# Altium PCB RfLaunchPadAdapter.PcbDoc
Units mm, origin at the board's own origin, x right, y up, seen from the top; angles counter-clockwise.
Board outline 50.8 x 38 mm, 4 copper layers (TOP, PWR, GND, BOT), stack 0.777 mm thick; 16 components, 10 nets, 93 pads, 7 vias.
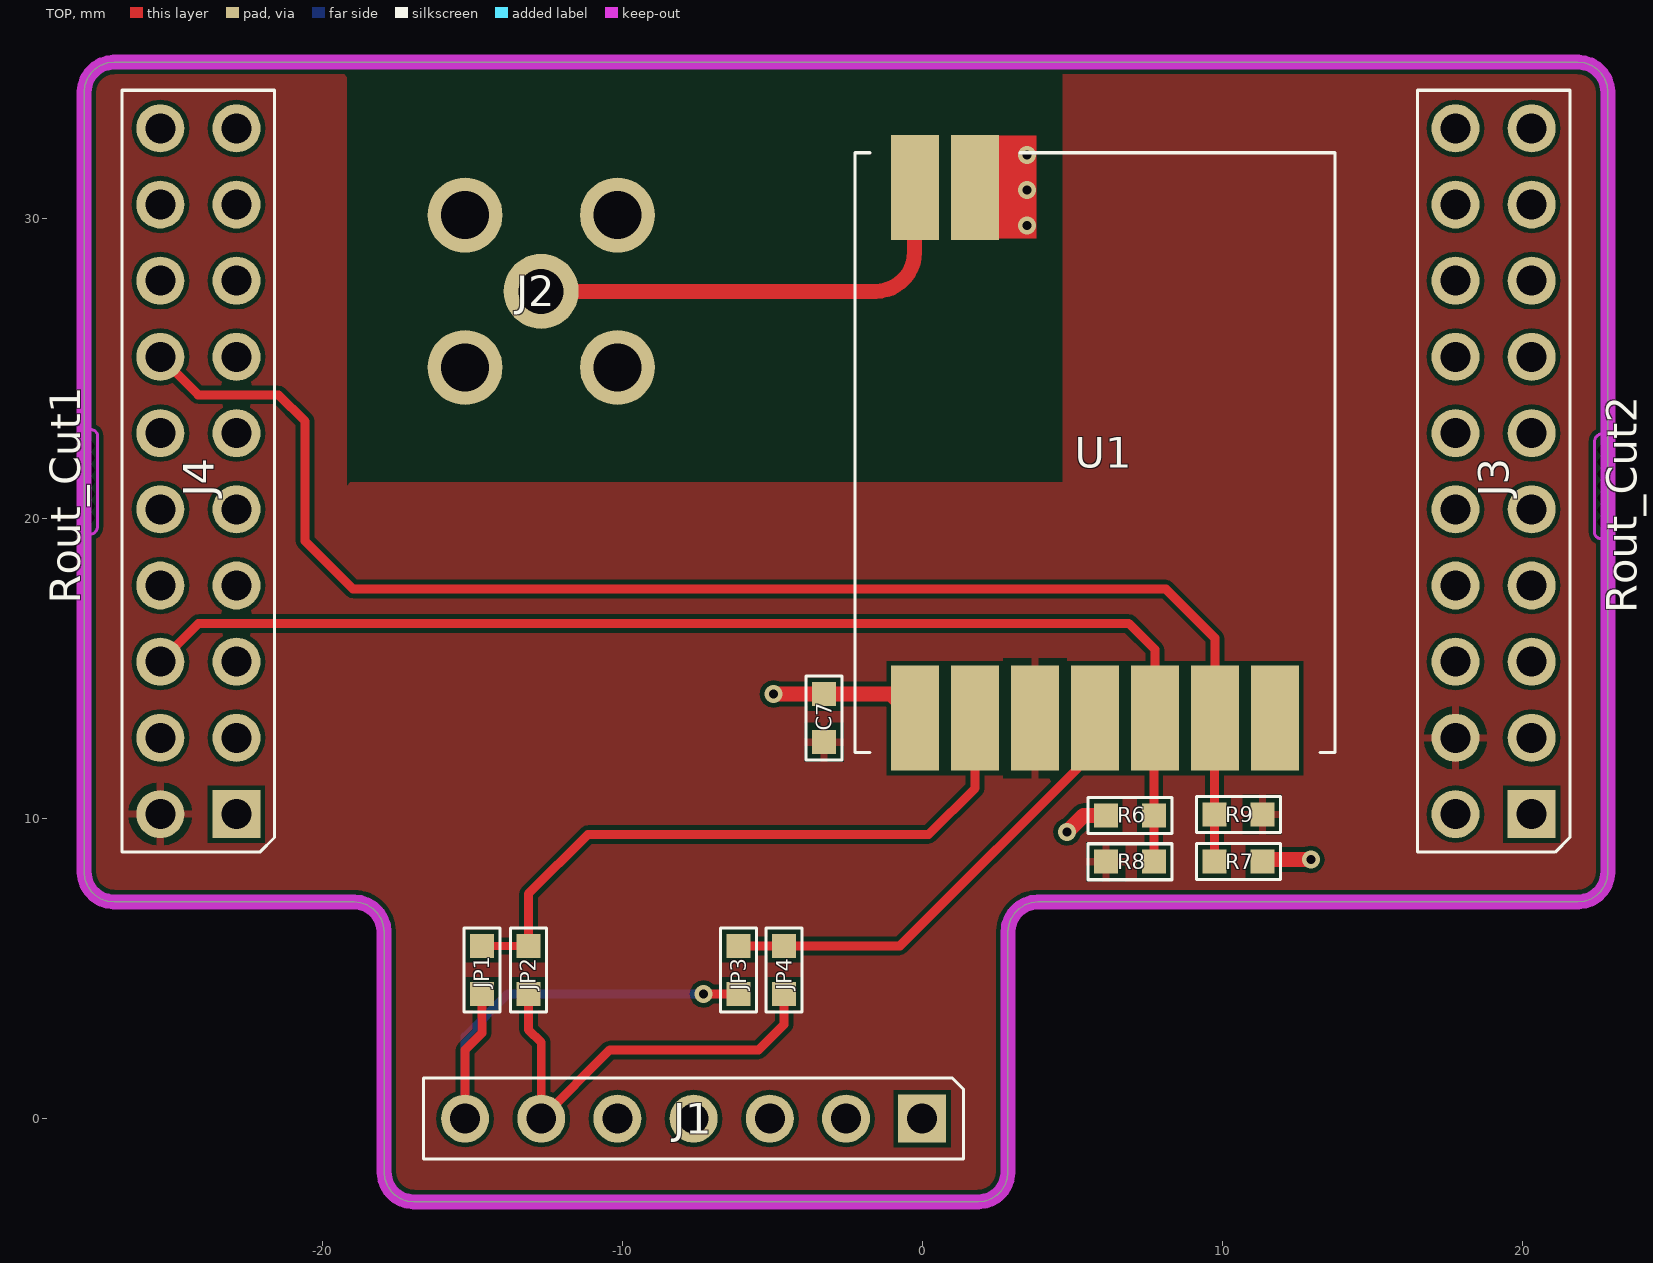
[diagram p0: TOP view]
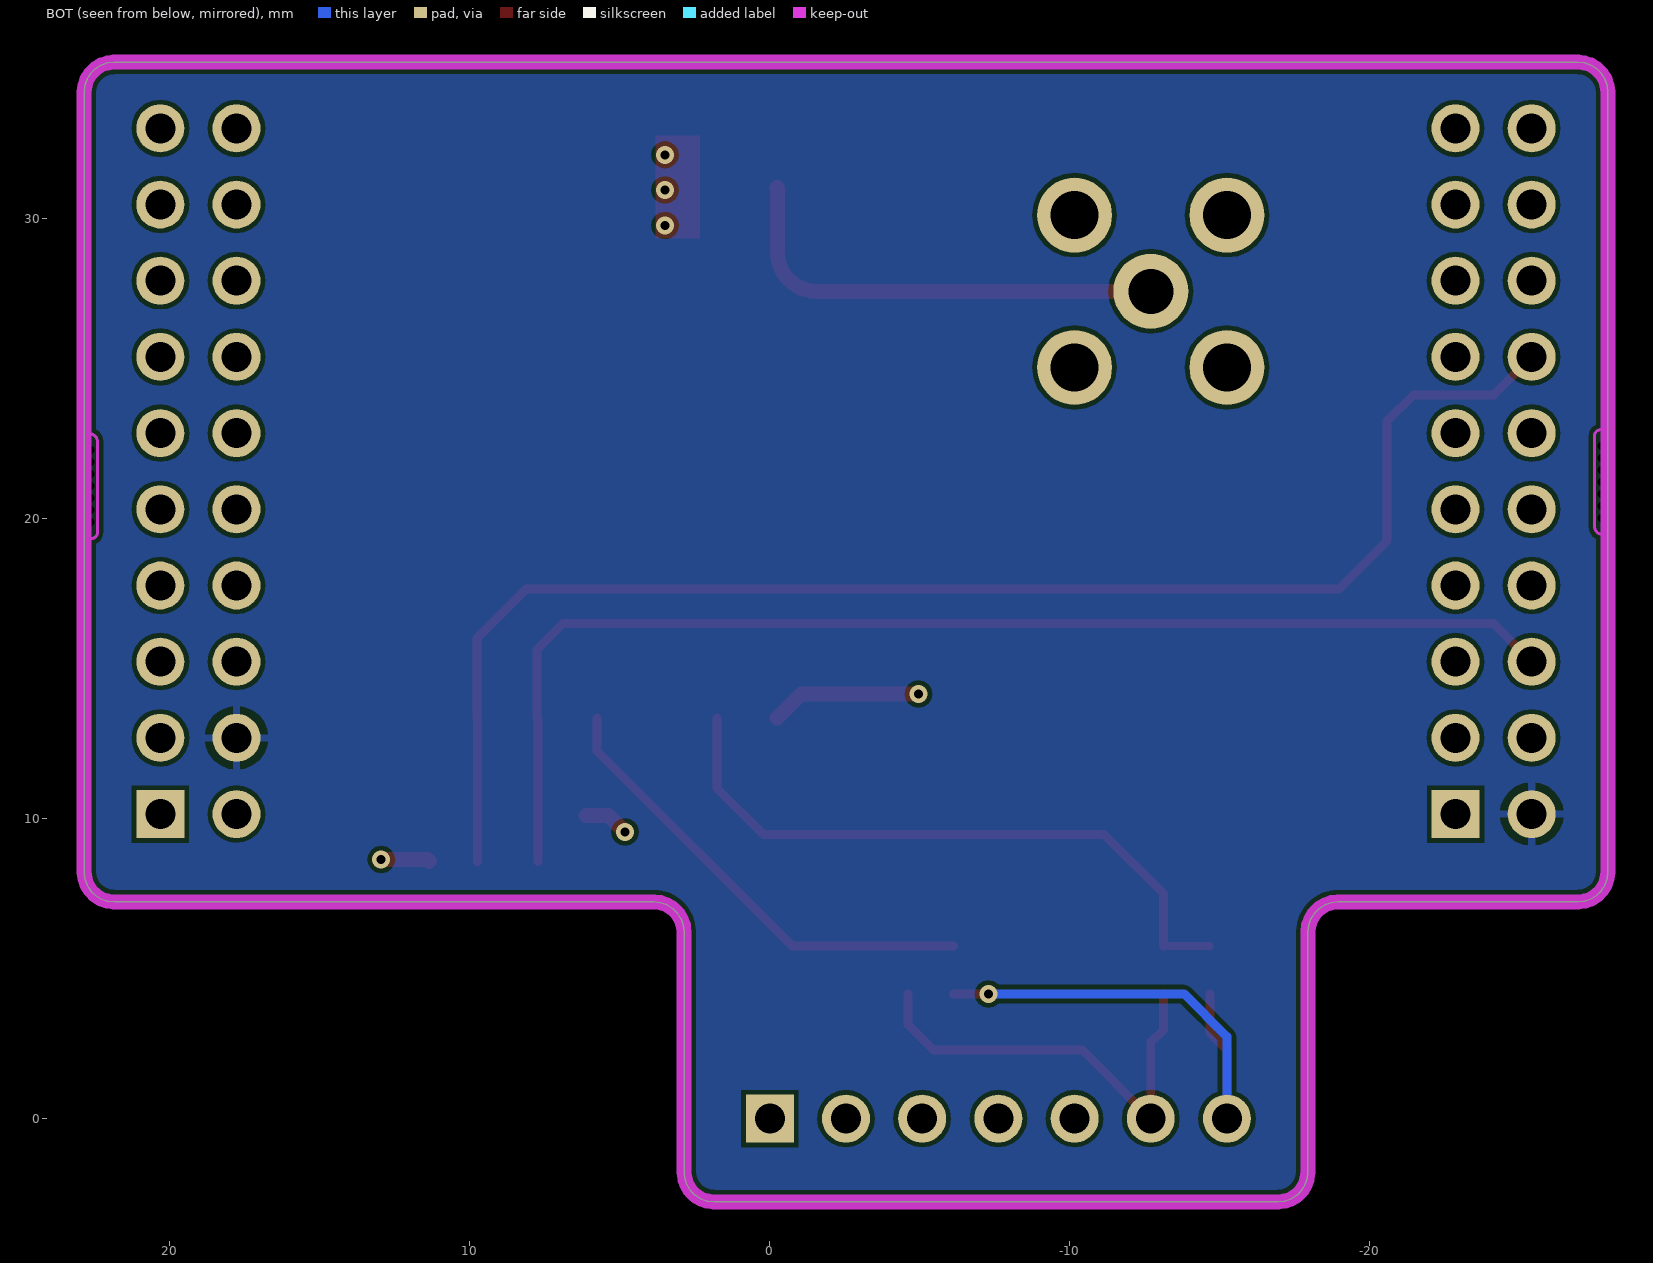
[diagram p1: BOT view, seen from below]
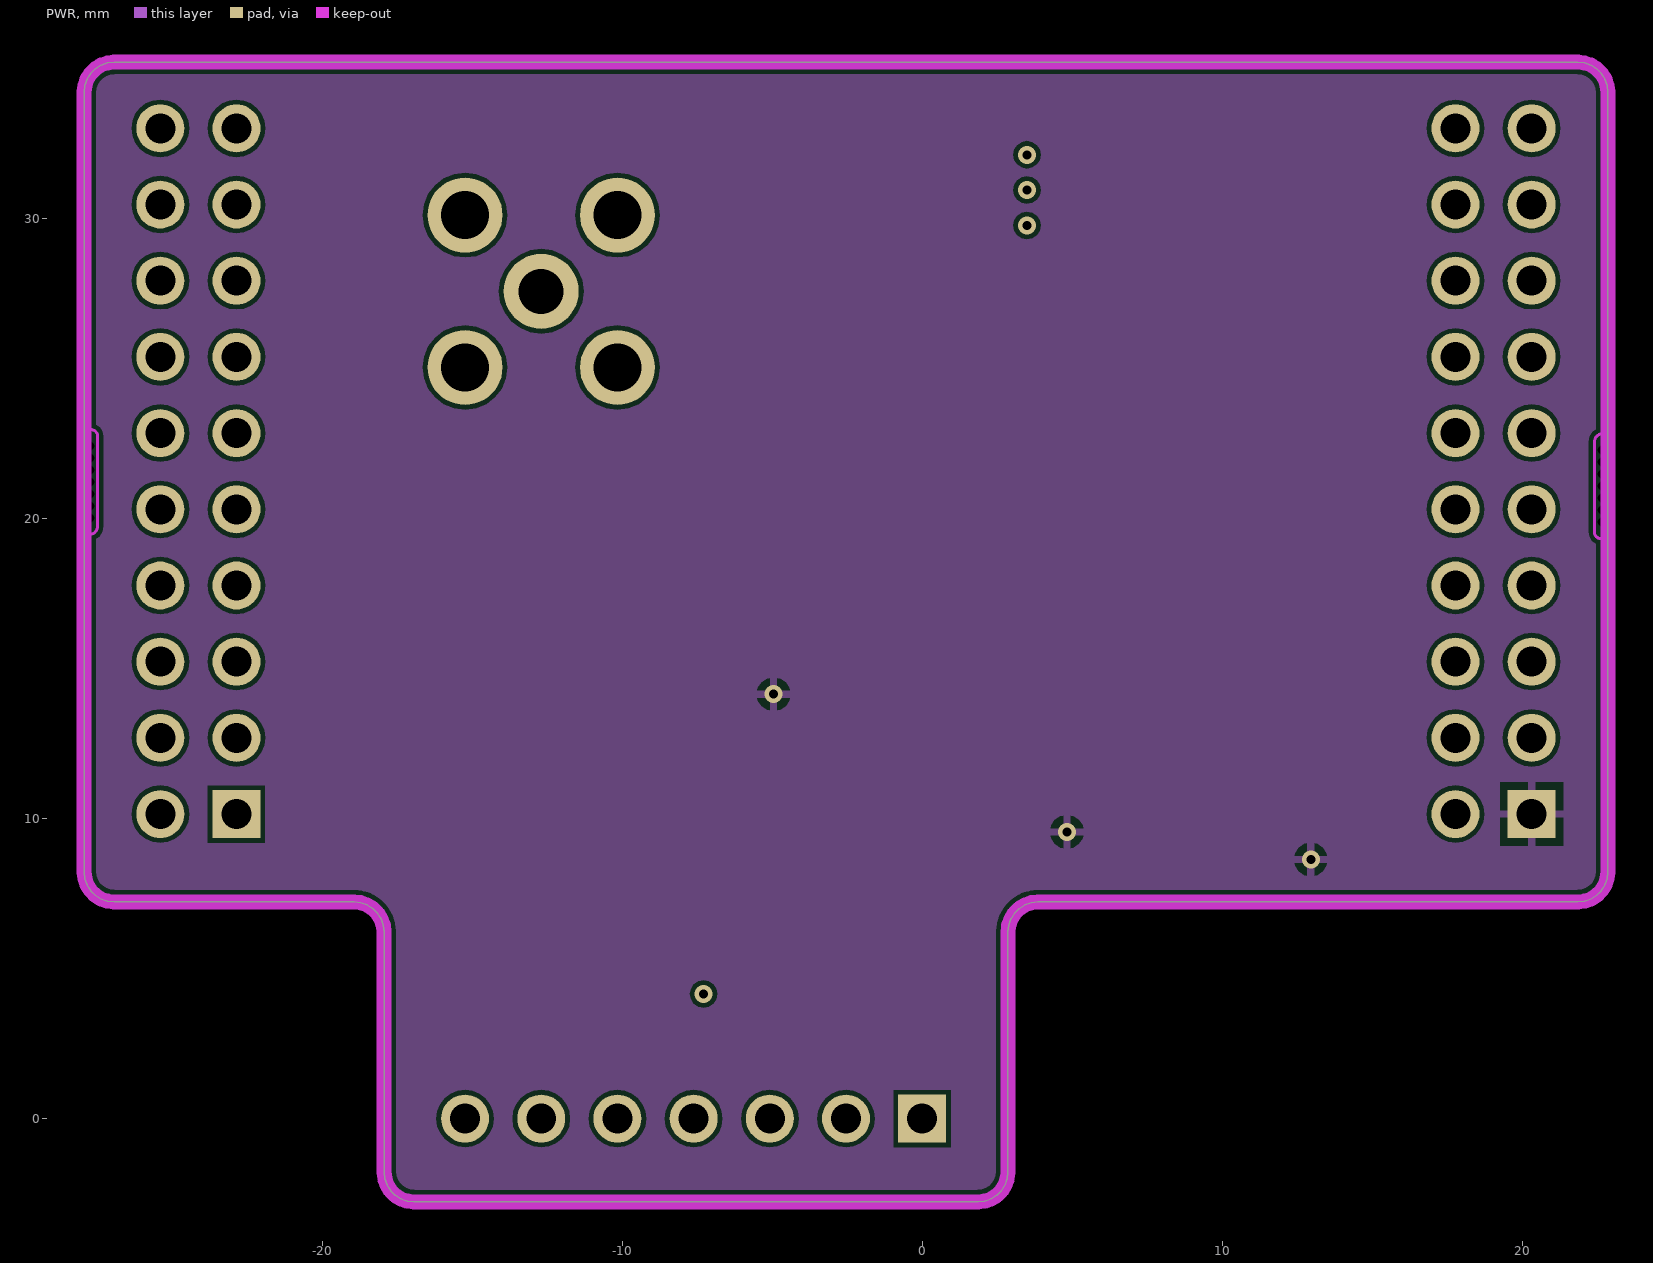
[diagram p2: PWR]
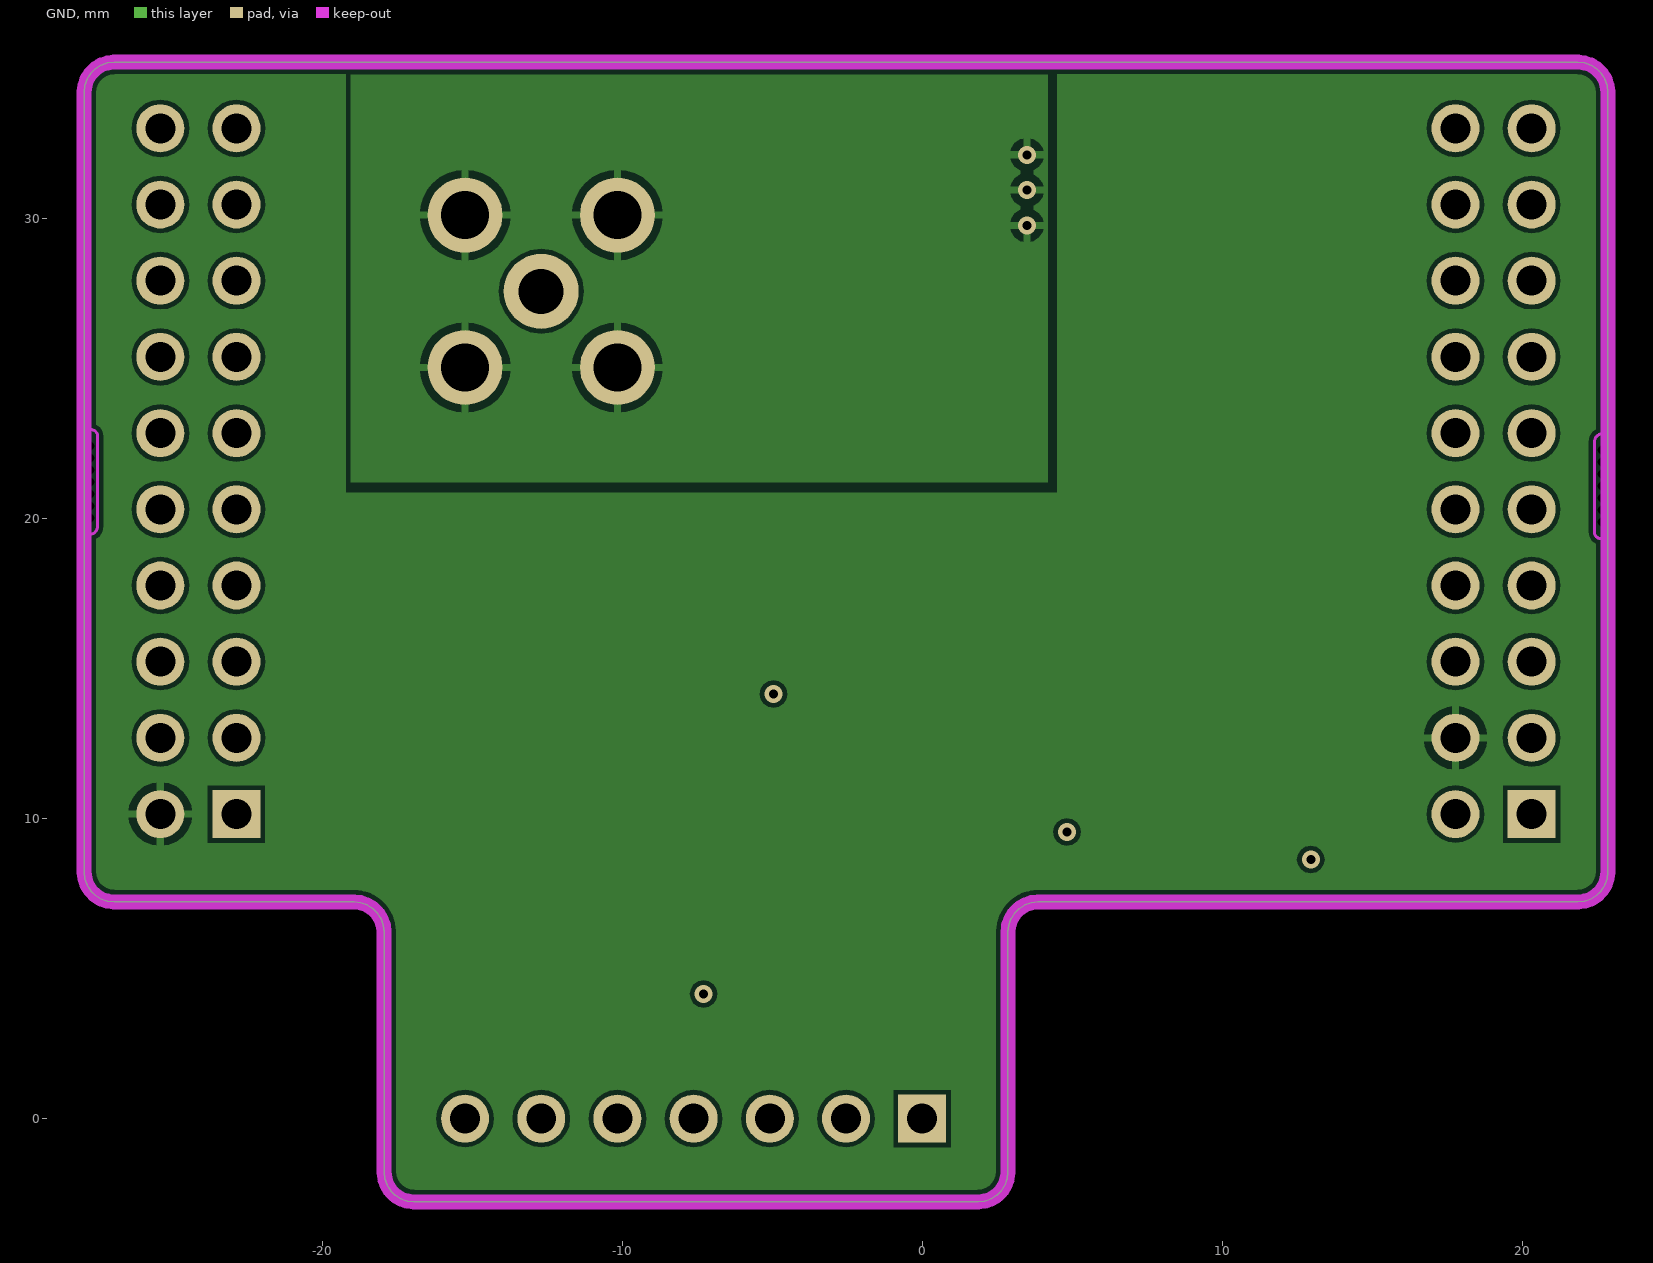
[diagram p3: GND]
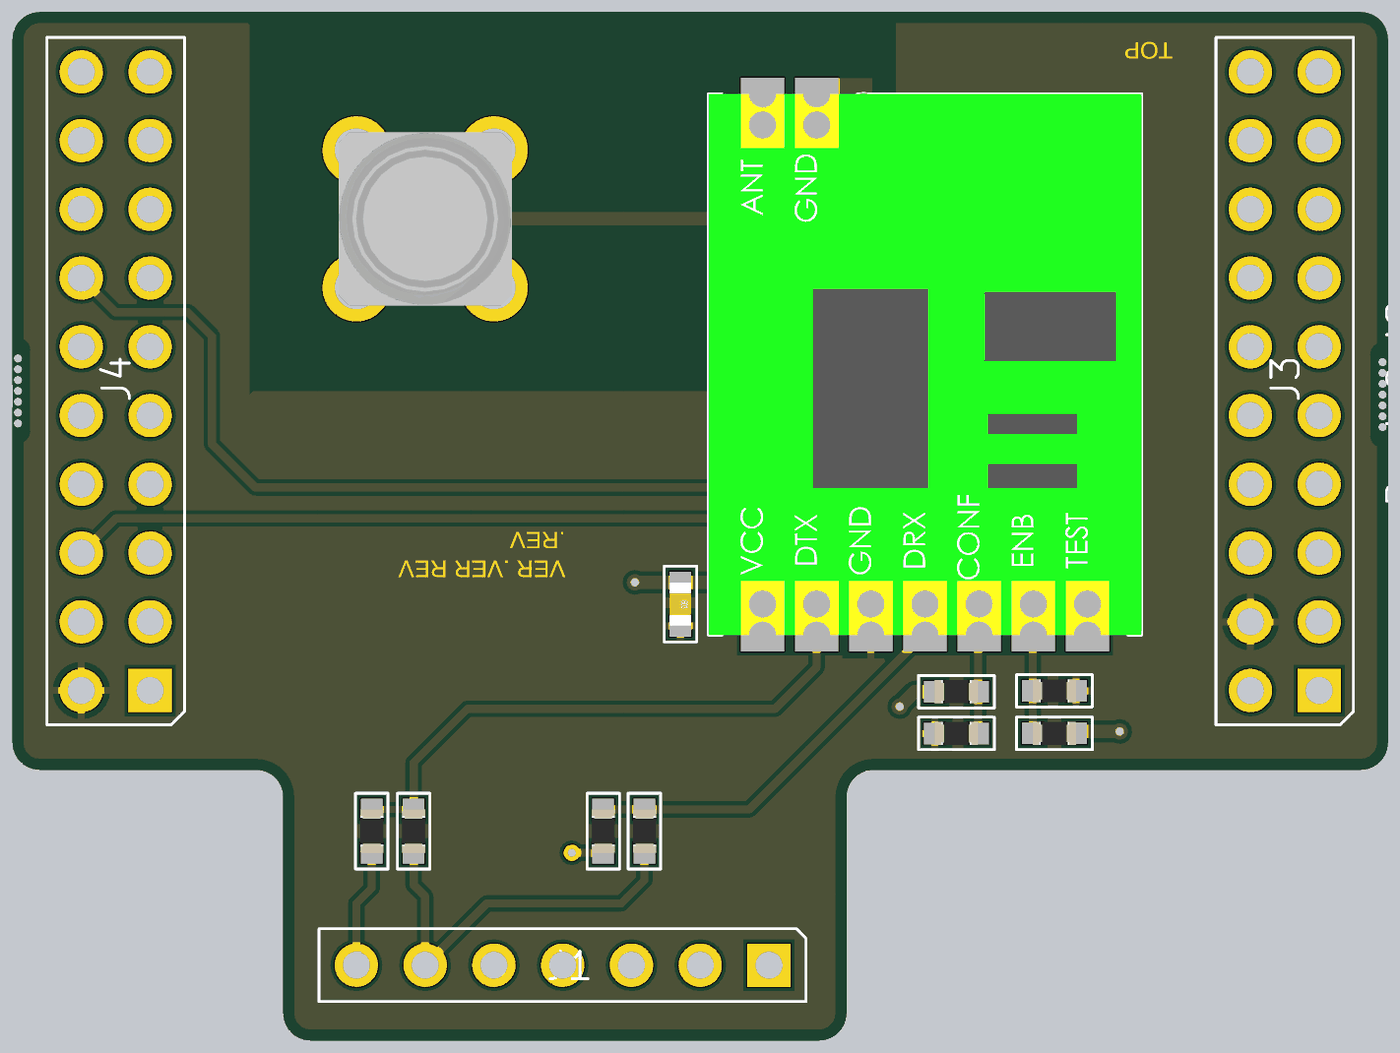
[diagram p4: 3D render of the assembled board from above, using the file's embedded part models]

## Layer stack, top to bottom
Top Solder: solder mask 0.01, Solder Resist, Dk 3.5
TOP: signal copper 0.018
Dielectric 1: core 0.288, FR-4, Dk 4.8
PWR: signal copper 0.036
Dielectric 3: prepreg 0.127, Dk 4.2
GND: signal copper 0.036
Dielectric 2: core 0.254, Dk 4.2
BOT: signal copper 0.018
Bottom Solder: solder mask 0.01, Solder Resist, Dk 3.5

## Board outline
-16.94,-2.78 1.86,-2.78 2.083,-2.755 2.294,-2.681 2.483,-2.562 2.642,-2.403 2.761,-2.214 2.835,-2.003 2.86,-1.78 2.86,6.22 2.885,6.443 2.959,6.654 3.078,6.843 3.237,7.002 3.426,7.121 3.637,7.195 3.86,7.22 21.86,7.22 22.083,7.245 22.294,7.319 22.483,7.438 22.642,7.597 22.761,7.786 22.835,7.997 22.86,8.22 22.86,34.22 22.835,34.443 22.761,34.654 22.642,34.843 22.483,35.002 22.294,35.121 22.083,35.195 21.86,35.22 -26.94,35.22 -27.163,35.195 -27.374,35.121 -27.563,35.002 -27.722,34.843 -27.841,34.654 -27.915,34.443 -27.94,34.22 -27.94,8.22 -27.915,7.997 -27.841,7.786 -27.722,7.597 -27.563,7.438 -27.374,7.319 -27.163,7.245 -26.94,7.22 -18.94,7.22 -18.717,7.195 -18.506,7.121 -18.317,7.002 -18.158,6.843 -18.039,6.654 -17.965,6.443 -17.94,6.22 -17.94,-1.78 -17.915,-2.003 -17.841,-2.214 -17.722,-2.403 -17.563,-2.562 -17.374,-2.681 -17.163,-2.755

## Design rules (kind name [scope] priority, off if disabled: settings)
Clearance [All] p1: gap=0.15
DiffPairsRouting [All] p1: maxlimit=0.15 minlimit=0.15 mostfreqgap=0.15 toplayer_minwidth=0.3 toplayer_maxwidth=0.3 toplayer_prefwidth=0.3 midlayer1_minwidth=0.3 midlayer1_maxwidth=0.3 midlayer1_prefwidth=0.3 midlayer2_minwidth=0.3 midlayer2_maxwidth=0.3 midlayer2_prefwidth=0.3 bottomlayer_minwidth=0.3 bottomlayer_maxwidth=0.3 bottomlayer_prefwidth=0.3 maxuncoupledlength=12.7
HoleSize [All] p1: absolutevalues=TRUE maxlimit=3 minlimit=0.025 maxpercent=80.000 minpercent=20.000
HoleToHoleClearance HoleToHoleClearance_1 [InComponent('Rout_Cut1')And InComponent('Rout_Cut2') And InComponent('Rout_Cut3')And InComponent('Rout_Cut4')] p1: gap=0.05 allowstackedmicrovias=TRUE
HoleToHoleClearance [All] p2: gap=0.2 allowstackedmicrovias=TRUE
MinimumSolderMaskSliver MinimumSolderMaskSliver_1 [InComponent('Rout_Cut1') or InComponent('Rout_Cut2') or InComponent('Rout_Cut3') or InComponent('Rout_Cut4') or InComponent('1')] p1: minsoldermaskwidth=0.001
MinimumSolderMaskSliver [All] p2: minsoldermaskwidth=0.1
PolygonConnect [All] p1: connectstyle=Relief reliefconductorwidth=0.254 reliefentries=4 polygonreliefangle="90 Angle" airgapwidth=0.254
RoutingVias [All] p1: holewidth=0.2 width=0.5 viastyle="Through Hole" minholewidth=0.2 minwidth=0.5 maxholewidth=0.711 maxwidth=1.27
SilkToSilkClearance [All] p1 off: silktosilkclearance=0.1
SilkToSolderMaskClearance [IsPad] p1 off: minsilkscreentomaskgap=0.1 clearancetoexposedcopper=TRUE
SolderMaskExpansion [All] p1: expansion=0.05
Width Width_1 [InComponent('?')] p1: maxlimit=0.254 minlimit=0.001 preferedwidth=0.254 midlayer1_minwidth=0.254 midlayer2_minwidth=0.254 minimp=50.000000 maximp=50.000000 favimp=50.000000
Width [All] p2: maxlimit=1 minlimit=0.1 preferedwidth=0.254 toplayer_prefwidth=0.15 midlayer1_minwidth=0.254 midlayer2_minwidth=0.254 bottomlayer_prefwidth=0.15 minimp=50.000000 maximp=50.000000 favimp=50.000000
24 further rules are at their usual default settings.

## Components (designator, comment, footprint, x,y, rotation, side; value= is the part's Value field where it differs from the comment)
C7 "GRM188R61C105KA93D" C0603 -3.269,13.347 r270 top
J1 "Header 1x7" "Post Height Terminal Strip 1x7" 0,0 r180 top
J2 "5-1814832-1" 5-1814832-1 -12.7,27.579 r0 top
J3 "Header 2x10" "Post Height Terminal Strip 2x10" 19.05,21.581 r90 top
J4 "Header 2x10" "Post Height Terminal Strip 2x10" -24.13,21.581 r90 top
JP1 "ERJ-3GEY0R00V" R0603 -14.672,4.953 r90 top
JP2 "ERJ-3GEY0R00V" R0603 -13.125,4.953 r90 top
JP3 "ERJ-3GEY0R00V" R0603 -6.125,4.953 r90 top
JP4 "ERJ-3GEY0R00V" R0603 -4.601,4.953 r90 top
R6 "ERJ-3EKF1002V" R0603 6.922,10.106 r180 top
R7 "ERJ-3EKF1002V" R0603 10.541,8.566 r0 top
R8 "ERJ-3EKF1002V" R0603 6.922,8.562 r0 top
R9 "ERJ-3EKF1002V" R0603 10.541,10.137 r180 top
Rout_Cut1 "Rout_Cut" RoutCut -27.94,21.22 r90 top
Rout_Cut2 "Rout_Cut" RoutCut 22.86,21.082 r270 top
U1 "HM-TRP" HM-TRP -0.238,13.347 r0 top

## Footprints (in the part's own frame and the unit in brackets; to place one, negate y for a bottom-side part, rotate by r counter-clockwise, add the part's x,y. Pads: shape width x height; smd on the part's side, far side on the other; paste and mask are expansions set on the pad)
5-1814832-1 [mm] "SMA Connector Jack, Female Socket 50 Ohm Through Hole Solder"
  round 2.5 hole 1.5: 1(0,0)
  round 2.5 hole 1.6: 2(-2.54,2.54) 3(-2.54,-2.54) 4(2.54,-2.54) 5(2.54,2.54)
  body extent -3.2,-3.2 3.2,3.2, height 9.5
C0603 [mm]
  rect 0.8x0.8 smd: 1(-0.8,0) 2(0.8,0)
  silkscreen extent -1.4,-0.6 1.4,0.6, body extent -0.8,-0.4 0.8,0.4, height 0.3
HM-TRP [mm]
  rect 1.6x3.5 smd: 1(0,0) 2(2,0) 3(4,0) 4(6,0) 5(8,0) 6(10,0) 7(12,0) 8(2,17.7) 9(0,17.7)
  silkscreen extent -2,-1.15 14,18.85, body extent -2,-1.15 14,18.85, height 2
"Post Height Terminal Strip 1x7" [mm]
  rect 1.6x1.6 hole 1: 1(0,0)
  round 1.6 hole 1: 2(2.54,0) 3(5.08,0) 4(7.62,0) 5(10.16,0) 6(12.7,0) 7(15.24,0)
  silkscreen extent -1.37,-1.35 16.62,1.35
"Post Height Terminal Strip 2x10" [mm]
  rect 1.6x1.6 hole 1: 1(-11.43,-1.27)
  round 1.6 hole 1: 2(-11.43,1.27) 3(-8.89,-1.27) 4(-8.89,1.27) 5(-6.35,-1.27) 6(-6.35,1.27) 7(-3.81,-1.27) 8(-3.81,1.27) 9(-1.27,-1.27) 10(-1.27,1.27) 11(1.27,-1.27) 12(1.27,1.27) 13(3.81,-1.27) 14(3.81,1.27) 15(6.35,-1.27) 16(6.35,1.27) 17(8.89,-1.27) 18(8.89,1.27) 19(11.43,-1.27) 20(11.43,1.27)
  silkscreen extent -12.7,-2.54 12.7,2.54
R0603 [mm]
  rect 0.8x0.8 smd: 1(-0.8,0) 2(0.8,0)
  silkscreen extent -1.4,-0.6 1.4,0.6, body extent -0.8,-0.42 0.8,0.43, height 0.45
RoutCut [mm]
  round 0 hole 0.3 unplated: 1(-1.2,-0.2) 1(-0.8,-0.2) 1(-0.4,-0.2) 1(0,-0.2) 1(0.4,-0.2) 1(1.2,-0.2) 2(0.8,-0.2)
  Keep-Out Layer lines w0.1: -1.75,-0.175 ccw(c-1.475,-0.175) -1.475,-0.45 1.525,-0.45 ccw(c1.525,-0.225) 1.75,-0.225

## Part data
C7: "CAP CER 1UF 16V 10% X5R 0603"
J2: "CONN SMA JACK STR 50 OHM PCB"
JP1 JP2 JP3 JP4: "0R JUMPER 1/10W"
R6 R7 R8 R9: "10K OHM 1% 1/10W 0603"
Rout_Cut1 Rout_Cut2: "1.6mm"

## Via types
v1: diameter 0.6, hole 0.3, TOP to BOT, 7 vias

## Nets (pads, with @x,y where several pads share a name; then routed paths per layer and width w, separated by ;. In a path a pad name is that pad's centre, name@x,y a point inside that pad or via, vN(x,y) a via of type N, cw(c..) or ccw(c..) an arc to the next point about the centre after c; other vN are vias at no path point)
+3V3: C7.1 J3.1 R6.2 R7.2 U1.1 | length 8.2
  TOP w0.5: v1(-4.953,14.147) C7.1 -1.038,14.147 U1.1 ; v1(4.826,9.556) 5.376,10.106 R6.2 ; R7.2 11.411,8.636 v1(12.954,8.636)
CONFIG: J4.6 R6.1 R8.2 U1.5 | length 41.1
  TOP w0.3: J4.6 -24.121,16.51 6.886,16.51 7.762,15.634 U1.5 7.722,13.307 R6.1 R8.2
ENABLE: J4.14 R7.1 R9.2 U1.6 | length 48.8
  TOP w0.3: J4.14 -24.139,24.13 -21.463,24.13 -20.574,23.241 -20.574,19.252 -18.975,17.653 8.128,17.653 9.762,16.019 U1.6 9.741,13.327 R9.2 R7.1
GND: C7.2 J3.4 J4.2 R8.1 R9.1 U1.3
GND_ANT: J2.2 J2.3 J2.4 J2.5 U1.8
  other v1: 3.49,29.777 3.49,30.954 3.49,32.131
NetJ2_1: J2.1 U1.9 | length 15.4
  TOP w0.5: J2.1 -1.555,27.579 ccw(c-1.555,28.88) -0.254,28.88 -0.254,31.047 U1.9
RX_HM-RTP: JP1.2 JP2.2 U1.2 | length 22
  TOP w0.254: JP1.2 JP2.2
  TOP w0.3: JP2.2 -13.125,7.488 -11.14,9.473 0.217,9.473 1.762,11.018 U1.2
RX_ICD: J1.7 JP1.1 JP3.1 | length 16.8
  TOP w0.3: J1.7 -15.24,2.286 -14.672,2.854 JP1.1 ; v1(-7.283,4.153) JP3.1
  BOT w0.3: J1.7 -15.24,2.73 -13.816,4.153 v1(-7.283,4.153)
TX_HM-RTP: JP3.2 JP4.2 U1.4 | length 15.7
  TOP w0.3: JP3.2 JP4.2 -0.745,5.753 5.762,12.26 U1.4
TX_ICD: J1.6 JP2.1 JP4.1 | length 14.7
  TOP w0.3: JP2.1 -13.125,2.965 -12.7,2.54 J1.6 -10.413,2.286 -5.455,2.286 -4.601,3.14 JP4.1
pads on no net: J1.1 J1.2 J1.3 J1.4 J1.5 J3.2 J3.3 J3.5 J3.6 J3.7 J3.8 J3.9 J3.10 J3.11 J3.12 J3.13 J3.14 J3.15 J3.16 J3.17 J3.18 J3.19 J3.20 J4.1 J4.3 J4.4 J4.5 J4.7 J4.8 J4.9 J4.10 J4.11 J4.12 J4.13 J4.15 J4.16 J4.17 J4.18 J4.19 J4.20 Rout_Cut1.1 Rout_Cut1.2 Rout_Cut2.1 Rout_Cut2.2 U1.7

## Polygon pours and split planes (outlines as drawn)
GND on BOT "BOT-GND" (solid, pour order 1): -16.94,-2.78 1.86,-2.78 2.083,-2.755 2.294,-2.681 2.483,-2.562 2.642,-2.403 2.761,-2.214 2.835,-2.003 2.86,-1.78 2.86,6.22 2.885,6.443 2.959,6.654 3.078,6.843 3.237,7.002 3.426,7.121 3.637,7.195 3.86,7.22 21.86,7.22 22.083,7.245 22.294,7.319 22.483,7.438 22.642,7.597 22.761,7.786 22.835,7.997 22.86,8.22 22.86,34.22 22.835,34.443 22.761,34.654 22.642,34.843 22.483,35.002 22.294,35.121 22.083,35.195 21.86,35.22 -26.94,35.22 -27.163,35.195 -27.374,35.121 -27.563,35.002 -27.722,34.843 -27.841,34.654 -27.915,34.443 -27.94,34.22 -27.94,8.22 -27.915,7.997 -27.841,7.786 -27.722,7.597 -27.563,7.438 -27.374,7.319 -27.163,7.245 -26.94,7.22 -18.94,7.22 -18.717,7.195 -18.506,7.121 -18.317,7.002 -18.158,6.843 -18.039,6.654 -17.965,6.443 -17.94,6.22 -17.94,-1.78 -17.915,-2.003 -17.841,-2.214 -17.722,-2.403 -17.563,-2.562 -17.374,-2.681 -17.163,-2.755
GND on TOP "TOP-GND" (solid, pour order 4): -16.94,-2.78 1.86,-2.78 2.083,-2.755 2.294,-2.681 2.483,-2.562 2.642,-2.403 2.761,-2.214 2.835,-2.003 2.86,-1.78 2.86,6.22 2.885,6.443 2.959,6.654 3.078,6.843 3.237,7.002 3.426,7.121 3.637,7.195 3.86,7.22 21.86,7.22 22.083,7.245 22.294,7.319 22.483,7.438 22.642,7.597 22.761,7.786 22.835,7.997 22.86,8.22 22.86,34.22 22.835,34.443 22.761,34.654 22.642,34.843 22.483,35.002 22.294,35.121 22.083,35.195 21.86,35.22 -26.94,35.22 -27.163,35.195 -27.374,35.121 -27.563,35.002 -27.722,34.843 -27.841,34.654 -27.915,34.443 -27.94,34.22 -27.94,8.22 -27.915,7.997 -27.841,7.786 -27.722,7.597 -27.563,7.438 -27.374,7.319 -27.163,7.245 -26.94,7.22 -18.94,7.22 -18.717,7.195 -18.506,7.121 -18.317,7.002 -18.158,6.843 -18.039,6.654 -17.965,6.443 -17.94,6.22 -17.94,-1.78 -17.915,-2.003 -17.841,-2.214 -17.722,-2.403 -17.563,-2.562 -17.374,-2.681 -17.163,-2.755
GND_ANT on GND "Top Layer-No Net" (solid, pour order 11): -19.05,21.209 -19.05,34.795 -18.034,34.795 -18.017,34.795 3.683,34.795 4.191,34.795 4.191,21.209
GND on GND "TOP-GND" (solid, pour order 7): -17.21,-2.857 1.59,-2.857 1.813,-2.832 2.024,-2.758 2.213,-2.639 2.372,-2.48 2.491,-2.291 2.565,-2.079 2.59,-1.857 2.59,6.143 2.615,6.366 2.689,6.577 2.808,6.767 2.967,6.925 3.156,7.044 3.367,7.118 3.59,7.143 21.59,7.143 21.813,7.168 22.024,7.242 22.213,7.361 22.372,7.52 22.491,7.709 22.565,7.921 22.59,8.143 22.59,34.143 22.565,34.366 22.491,34.577 22.372,34.767 22.213,34.925 22.024,35.044 21.813,35.118 21.59,35.143 4.51,35.044 4.51,20.863 -19.21,20.863 -19.21,35.22 -27.21,35.143 -27.433,35.118 -27.644,35.044 -27.833,34.925 -27.992,34.767 -28.111,34.577 -28.185,34.366 -28.21,34.143 -28.21,8.143 -28.185,7.921 -28.111,7.709 -27.992,7.52 -27.833,7.361 -27.644,7.242 -27.433,7.168 -27.21,7.143 -19.21,7.143 -18.987,7.118 -18.776,7.044 -18.587,6.925 -18.428,6.767 -18.309,6.577 -18.235,6.366 -18.21,6.143 -18.21,-1.857 -18.185,-2.079 -18.111,-2.291 -17.992,-2.48 -17.833,-2.639 -17.644,-2.758 -17.433,-2.832
+3V3 on PWR "TOP-No Net" (solid, pour order 15): -16.94,-2.78 1.86,-2.78 2.083,-2.755 2.294,-2.681 2.483,-2.562 2.642,-2.403 2.761,-2.214 2.835,-2.003 2.86,-1.78 2.86,6.22 2.885,6.443 2.959,6.654 3.078,6.843 3.237,7.002 3.426,7.121 3.637,7.195 3.86,7.22 21.86,7.22 22.083,7.245 22.294,7.319 22.483,7.438 22.642,7.597 22.761,7.786 22.835,7.997 22.86,8.22 22.86,34.22 22.835,34.443 22.761,34.654 22.642,34.843 22.483,35.002 22.294,35.121 22.083,35.195 21.86,35.22 -26.94,35.22 -27.163,35.195 -27.374,35.121 -27.563,35.002 -27.722,34.843 -27.841,34.654 -27.915,34.443 -27.94,34.22 -27.94,8.22 -27.915,7.997 -27.841,7.786 -27.722,7.597 -27.563,7.438 -27.374,7.319 -27.163,7.245 -26.94,7.22 -18.94,7.22 -18.717,7.195 -18.506,7.121 -18.317,7.002 -18.158,6.843 -18.039,6.654 -17.965,6.443 -17.94,6.22 -17.94,-1.78 -17.915,-2.003 -17.841,-2.214 -17.722,-2.403 -17.563,-2.562 -17.374,-2.681 -17.163,-2.755

## Keep-outs
Keep-Out Layer:
  the board outline again, w0.5

## Other copper
TOP:
  rectangle net GND_ANT: 2.326,29.337 3.815,32.766
  pour cut-out: -19.177,35.179 4.658,35.179 4.679,35.2 4.679,21.209 -19.064,21.209 -19.191,21.082

## Silkscreen, mask and mechanical layers (free items; w line width, h text height)
Top Solder:
  text "TOP" at 14.859,34.191 h1 r180
  text "VER .VER REV .REV" at -7.57,15.024 h1 r180
  text ".ProjectTitle" at -7.57,14.22 h1 r180
  text ".Project" at -7.57,12.807 h1.5 r180
Mechanical 7:
  drawing of 164 lines, arcs and shapes, not listed